# Altium PCB lononTV.PcbDoc
Units mm, origin at the board's own origin, x right, y up, seen from the top; angles counter-clockwise.
Board outline 55 x 82 mm, 2 copper layers (Top Layer, Bottom Layer); 56 components, 53 nets, 263 pads, 431 vias.
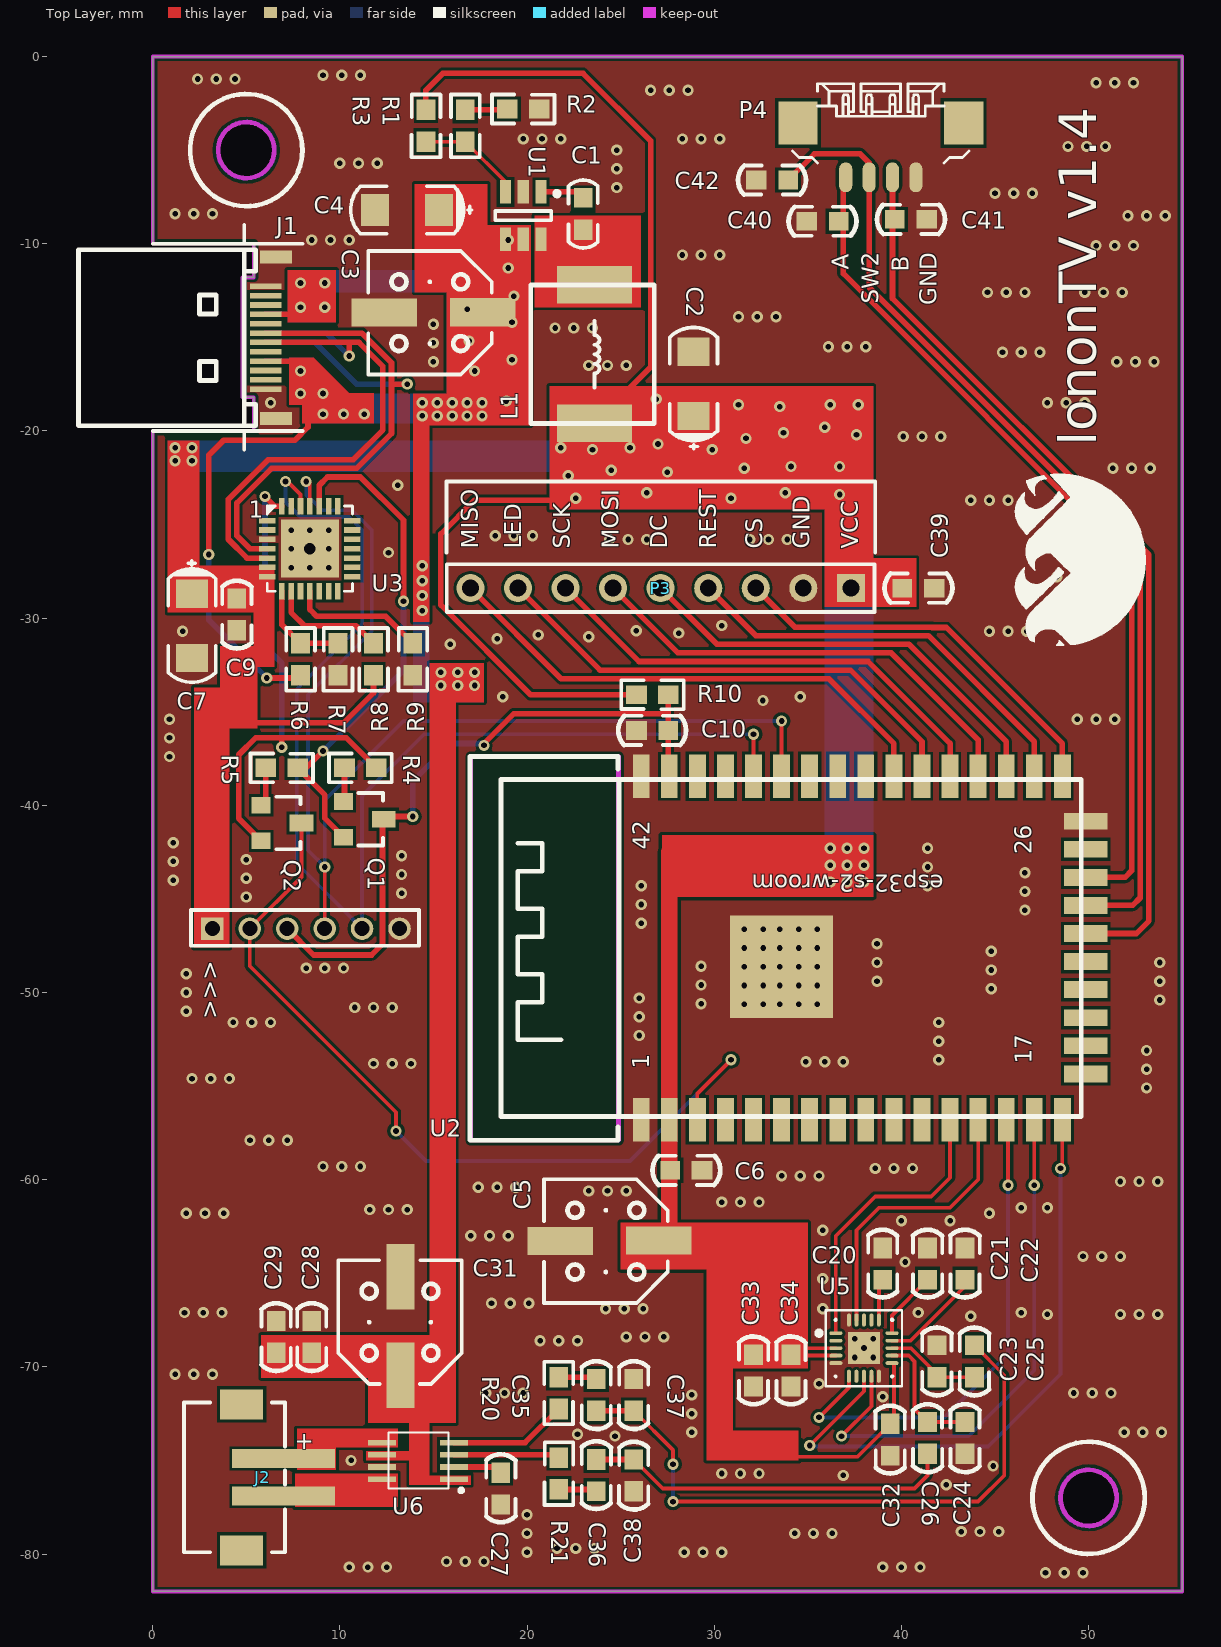
[diagram p0: Top Layer view]
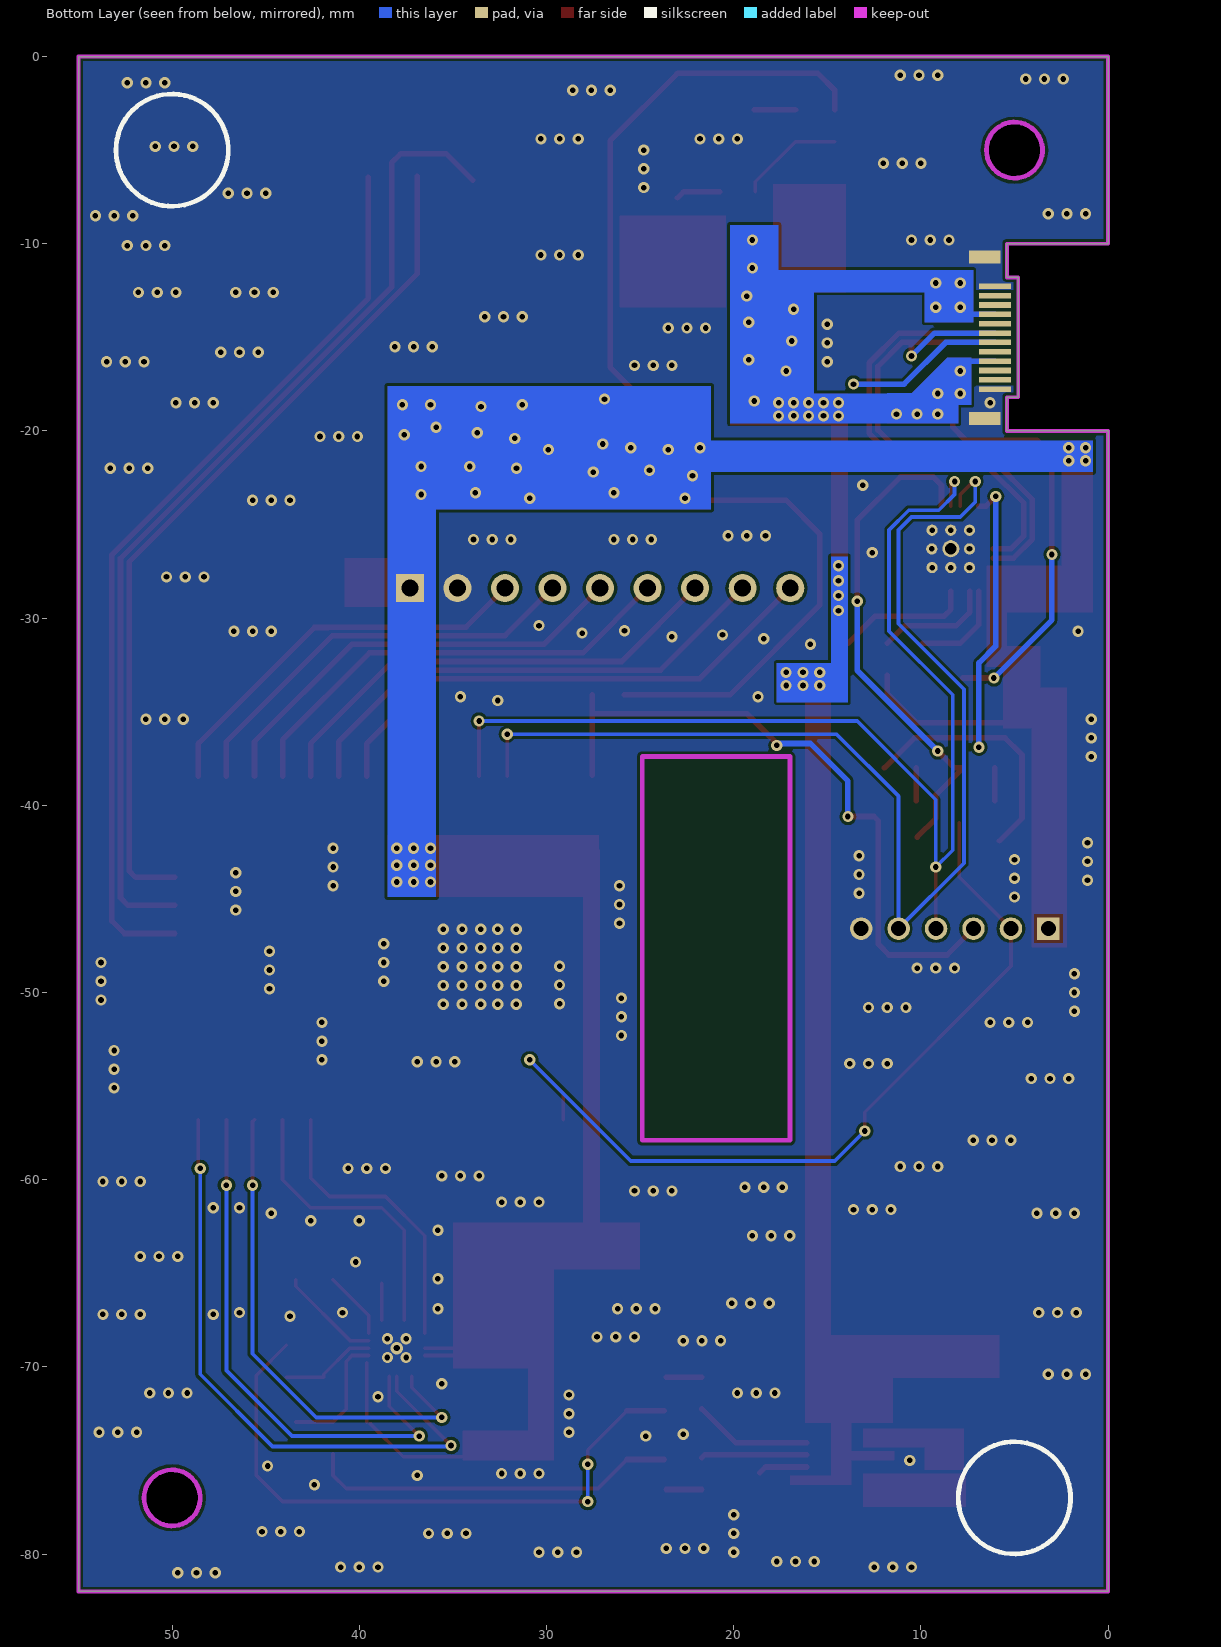
[diagram p1: Bottom Layer view, seen from below]

## Layer stack, top to bottom
Top Layer: signal copper 0.0356
Dielectric: dielectric 0.32, FR-4, Dk 4.8
Bottom Layer: signal copper 0.0356

## Board outline
0,-82 0,-20 5.4,-20 5.4,-18.2 4.8,-18.2 4.8,-11.8 5.4,-11.8 5.4,-10 0,-10 0,0 55,0 55,-82
cut-out: 5,-6.5 cw(c5,-5) 3.5,-5 cw(c5,-5) 5,-3.5 cw(c5,-5) 6.5,-5 cw(c5,-5)
cut-out: 48.5,-77 ccw(c50,-77) 50,-78.5 ccw(c50,-77) 51.5,-77 ccw(c50,-77) 50,-75.5 ccw(c50,-77)

## Design rules (kind name [scope] priority, off if disabled: settings)
Clearance [All] p1: gap=0.16
ComponentClearance [All] p1 off: gap=0.254 collisioncheckmode=3 verticalgap=0.254 showdistances=FALSE
PolygonConnect [All] p1: connectstyle=Direct reliefconductorwidth=0.254 reliefentries=4 polygonreliefangle="90 Angle"
RoutingVias [All] p1: holewidth=0.3 width=0.6 viastyle="Through Hole" minholewidth=0.3 minwidth=0.6 maxholewidth=0.3 maxwidth=0.6
SilkscreenOverComponentPads [All] p1: minsilkscreentomaskgap=0.254
SolderMaskExpansion [All] p1: expansion=0.102
Width [All] p1: maxlimit=3 minlimit=0.2 preferedwidth=0.2
26 further rules are at their usual default settings.

## Components (designator, comment, footprint, x,y, rotation, side; value= is the part's Value field where it differs from the comment)
<<< "" 6PIN_2.0 3.2,-46.6 r0 top
C1 "100nF" 0603C 23,-8.4 r270 top
C2 "10uF" 1206-A 28.9,-19.2 r90 top
C3 "220uF" 铝电容6.6 15,-13.7 r0 top
C4 "10uF" 1206-A 15.3,-8.2 r180 top
C5 "220uF/16v" 铝电容6.6 24.4,-63.3 r0 top
C6 "104" "C0603 - duplicate" 28.5,-59.5 r0 top
C7 "10uF" 1206-A 2.1,-28.7 r270 top
C9 "104" "C0603 - duplicate" 4.5,-29.8 r270 top
C10 "105" "C0603 - duplicate" 26.7,-36 r180 top
C20 "105" "C0603 - duplicate" 39,-64.5 r90 top
C21 "105" "C0603 - duplicate" 41.4,-64.5 r90 top
C22 "105" "C0603 - duplicate" 43.4,-64.5 r90 top
C23 "22p" "C0603 - duplicate" 41.9,-69.7 r270 top
C24 "22p" "C0603 - duplicate" 43.4,-73.8 r270 top
C25 "105" "C0603 - duplicate" 43.9,-69.7 r270 top
C26 "105" "C0603 - duplicate" 41.4,-73.8 r270 top
C27 "105" "C0603 - duplicate" 18.6,-76.5 r90 top
C28 "104" "C0603 - duplicate" 8.5,-68.4 r270 top
C29 "105" "C0603 - duplicate" 6.6,-68.4 r270 top
C31 "220uF" 铝电容6.6 13.2,-67.8 r270 top
C32 "105" "C0603 - duplicate" 39.4,-73.9 r90 top
C33 "104" "C0603 - duplicate" 32.1,-70.2 r90 top
C34 "104" "C0603 - duplicate" 34.099,-70.2 r90 top
C35 "104" "C0603 - duplicate" 23.7,-71.5 r270 top
C36 "104" "C0603 - duplicate" 23.7,-75.8 r90 top
C37 "22p" "C0603 - duplicate" 25.7,-71.5 r270 top
C38 "22p" "C0603 - duplicate" 25.7,-75.8 r270 top
C39 "104" "C0603 - duplicate" 40.9,-28.4 r0 top
C40 "104" "C0603 - duplicate" 35.8,-8.8 r180 top
C41 "104" "C0603 - duplicate" 40.5,-8.7 r0 top
C42 "104" "C0603 - duplicate" 33.1,-6.6 r180 top
J1 "" TYPE-C夹板C2856664 6.6,-10.7 r270 top
J2 "SPK" "PH2.0-2P SMT 立" 6,-75.9 r90 top
L1 "6.8uH" 电感7.4*6.6 26.8,-12.2 r270 top
P3 "Display" HDR1X9 37.3,-28.4 r180 top
P4 "Header 4" "MX1.25-4P 卧" 38.9,-5 r0 top
Q1 "8050" 3904 10.2,-39.8 r270 top
Q2 "8050" 3904 5.8,-40 r270 top
R1 "10k" 0603R 16.7,-3.699 r270 top
R2 "1.3k" 0603R 19.8,-2.8 r180 top
R3 "51k" 0603R 14.6,-3.7 r270 top
R4 "10K" R0603 11.1,-38 r180 top
R5 "10K" R0603 6.9,-38 r180 top
R6 "22.1K" R0603 7.9,-32.2 r270 top
R7 "47.5K" R0603 9.9,-32.2 r270 top
R8 "2K" R0603 11.8,-32.2 r270 top
R9 "10K" R0603 13.9,-32.2 r270 top
R10 "10K" 0603R 26.7,-34.1 r0 top
R20 "150K" 0603R 21.7,-71.4 r90 top
R21 "150K" 0603R 21.7,-75.7 r270 top
U1 "STI3470" SOT-23-6L 19.8,-8.5 r270 top
U2 "esp32-s2-wroom" ESP32-S2-WROOM 26.1,-56.7 r90 top
U3 "CP2102N" "QFN 28-pin-05P" 8.4,-26.3 r270 top
U5 "ES8311" QFN20_3*3 36.5,-68.2 r0 top
U6 "NS4150" MSOP8 16.1,-76 r180 top

## Footprints (in the part's own frame and the unit in brackets; to place one, negate y for a bottom-side part, rotate by r counter-clockwise, add the part's x,y. Pads: shape width x height; smd on the part's side, far side on the other; paste and mask are expansions set on the pad)
6PIN_2.0 [mm]
  rect 1.2x1.2 hole 0.8: 1(-0.011,0.01)
  round 1.2 hole 0.8: 2(1.989,0.01) 3(3.989,0.01) 4(5.989,0.01) 5(7.989,0.01) 6(9.989,0.01)
  silkscreen extent -1.15,-0.91 11.03,1.01
0603C [mm]
  rect 1.05x1 smd: 1(-0.85,0)
  rect 1.1x1 smd: 2(0.85,0)
  silkscreen extent -1.8,-0.78 1.83,0.78
0603R [mm]
  rect 1.1x1 smd: 1(-0.85,0) 2(0.85,0)
  silkscreen extent -1.67,-0.77 1.67,0.77
1206-A [mm]
  rect 1.5x1.7 smd: 1(0,0) 2(3.429,0)
  silkscreen extent -1.76,-1.27 4.72,1.27
3904 [mm]
  rect 0.889x1.016 smd: 1(0,0) 3(1.9,0)
  rect 0.9x1.27 smd: 2(0.95,2.15)
  silkscreen extent -0.45,0.8 2.35,2.1
"C0603 - duplicate" [mm]
  rect 1.05x1 smd: 1(-0.85,0)
  rect 1.1x1 smd: 2(0.85,0)
  silkscreen extent -1.8,-0.78 1.83,0.78
ESP32-S2-WROOM [mm]
  rect 2.3x0.9 smd: 1(-0.1,0) 2(-0.1,-1.5) 3(-0.1,-3) 4(-0.1,-4.5) 5(-0.1,-6) 6(-0.1,-7.5) 7(-0.1,-9) 8(-0.1,-10.5) 9(-0.1,-12) 10(-0.1,-13.5) 11(-0.1,-15) 12(-0.1,-16.5) 13(-0.1,-18) 14(-0.1,-19.5) 15(-0.1,-21) 16(-0.1,-22.5) 27(18.25,-22.5) 28(18.25,-21) 29(18.25,-19.5) 30(18.25,-18) 31(18.25,-16.5) 32(18.25,-15) 33(18.25,-13.5) 34(18.25,-12) 35(18.25,-10.5) 36(18.25,-9) 37(18.25,-7.5) 38(18.25,-6) 39(18.25,-4.5) 40(18.25,-3) 41(18.25,-1.5) 42(18.25,0)
  rect 0.9x2.3 smd: 17(2.35,-23.75) 18(3.85,-23.75) 19(5.35,-23.75) 20(6.85,-23.75) 21(8.35,-23.75) 22(9.85,-23.75) 23(11.35,-23.75) 24(12.85,-23.75) 25(14.35,-23.75) 26(15.85,-23.75)
  rect 5.5x5.5 smd: 43(8.073,-7.5)
  Keep-Out Layer lines w0.254: -1.2,9.11 -1.2,1.21 19.3,1.21 19.3,9.11 -1.2,9.11
  silkscreen extent -1.2,-23.51 19.3,9.14
HDR1X9 [mm] "Connector; Header; 9 Position"
  rect 1.5x1.5 hole 0.9: 1(0,0)
  round 1.5 hole 0.9: 2(2.54,0) 3(5.08,0) 4(7.62,0) 5(10.16,0) 6(12.7,0) 7(15.24,0) 8(17.78,0) 9(20.32,0)
  silkscreen extent -1.27,-1.27 21.59,1.27
MSOP8 [mm]
  rect 1.5x0.3 smd: 1(0,0) 2(0,-0.65) 3(0,-1.3) 4(0,-1.95) 5(3.85,-1.95) 6(3.85,-1.3) 7(3.85,-0.65) 8(3.85,0)
  silkscreen extent -0.46,-2.5 3.5,0.68
"MX1.25-4P 卧" [mm]
  rect 2.1x2.3 smd: 0(-4.425,1.45) 0(4.425,1.45)
  oval 0.7x1.6 smd: 1(1.875,-1.45) 2(0.625,-1.45) 3(-0.625,-1.45) 4(-1.875,-1.45)
  silkscreen extent -4.71,-0.69 4.71,3.55
"PH2.0-2P SMT 立" [mm]
  rect 1.6x2.3 smd: 0(-3.9,1.25) 0(3.9,1.25)
  rect 1x5.5 smd: 1(-1,-1) 2(1,-1)
  silkscreen extent -4,-1.07 4,4.33
QFN20_3*3 [mm]
  oval 0.7x0.2 smd: 1(0,0) 2(0,-0.4) 3(0,-0.8) 4(0,-1.2) 5(0,-1.6) 11(3,-1.6) 12(3,-1.2) 13(3,-0.8) 14(3,-0.4) 15(3,0)
  oval 0.2x0.7 smd: 6(0.7,-2.3) 7(1.1,-2.3) 8(1.5,-2.3) 9(1.9,-2.3) 10(2.3,-2.3) 16(2.3,0.7) 17(1.9,0.7) 18(1.5,0.7) 19(1.1,0.7) 20(0.7,0.7)
  rect 1.7x1.7 smd: 21(1.5,-0.8)
  silkscreen extent -1.02,-2.83 3.53,1.23
"QFN 28-pin-05P" [mm]
  rect 0.3x0.88 smd: 1(-1.506,-2.276) 2(-1.006,-2.276) 3(-0.506,-2.276) 4(-0.006,-2.276) 5(0.494,-2.276) 6(0.994,-2.276) 7(1.494,-2.276) 15(1.494,2.274) 16(0.994,2.274) 17(0.494,2.274) 18(-0.006,2.274) 19(-0.506,2.274) 20(-1.006,2.274) 21(-1.506,2.274)
  rect 0.88x0.3 smd: 8(2.269,-1.501) 9(2.269,-1.001) 10(2.269,-0.501) 11(2.269,-0.001) 12(2.269,0.499) 13(2.269,0.999) 14(2.269,1.499) 22(-2.281,1.499) 23(-2.281,0.999) 24(-2.281,0.499) 25(-2.281,-0.001) 26(-2.281,-0.501) 27(-2.281,-1.001) 28(-2.281,-1.501)
  round 0.6 hole 0.3: 29(-0.996,1.002) 29(-0.996,0.002) 29(-0.996,-0.998) 29(0.004,1.018) 29(0.004,-0.998) 29(1.004,1.002) 29(1.004,0.002) 29(1.004,-0.998)
  round 0.914 hole 0.6: 29(-0.006,-0.001)
  rect 3.1x3.1 smd: 29(-0.006,-0.001)
  silkscreen extent -2.28,-2.28 2.27,2.27
R0603 [mm]
  rect 1.1x1 smd: 1(-0.85,0) 2(0.85,0)
  silkscreen extent -1.67,-0.77 1.67,0.77
SOT-23-6L [mm] "SOT23, 6-Leads, Body 3.0x2.9mm (max), Pitch 0.95mm, IPC Medium Density"
  rect 1.25x0.6 smd: 1(-1.272,0.945) 2(-1.272,-0.005) 3(-1.272,-0.955) 4(1.265,-0.95) 5(1.265,0) 6(1.265,0.95)
  silkscreen extent -1.3,-1.5 0.25,1.93
TYPE-C夹板C2856664 [mm]
  rect 0.7x1.7 smd: 25(0.004,-0.009) 25(8.644,-0.009)
  rect 0.7x1.7 smd far side: 26(0.004,-0.009) 26(8.644,-0.009)
  rect 0.3x1.7 smd: A1(1.574,-0.559) A2(2.074,-0.559) A3(2.574,-0.559) A4(3.074,-0.559) A5(3.574,-0.559) A6(4.074,-0.559) A7(4.574,-0.559) A8(5.074,-0.559) A9(5.574,-0.559) A10(6.074,-0.559) A11(6.574,-0.559) A12(7.074,-0.559)
  rect 0.3x1.7 smd far side: B1(7.074,-0.559) B2(6.574,-0.559) B3(6.074,-0.559) B4(5.574,-0.559) B5(5.074,-0.559) B6(4.574,-0.559) B7(4.074,-0.559) B8(3.574,-0.559) B9(3.074,-0.559) B10(2.574,-0.559) B11(2.074,-0.559) B12(1.574,-0.559)
  silkscreen extent -0.38,-10.56 9.02,-1.09
电感7.4*6.6 [mm]
  rect 2x4 smd: 1(0,-3.2) 2(7.4,-3.2)
  silkscreen extent 0,-6.6 7.4,0
铝电容6.6 [mm]
  rect 3.5x1.5 smd: 1(2.64,0.04) 2(-2.62,0.03)
  silkscreen extent -3.49,-3.29 3.11,3.31

## Part data
<<<: library part "Header 6", "Header, 6-Pin"
C1: library part CAP, "贴片电容"
C2 C3 C4: library part CAPACITOR, "钽电容"
C5 C31: library part CAPACITOR, "Capacitor"
C6 C7 C9 C10 C20 C21 C22 C23 C24 C25 C26 C27 C28 C29 C32 C33 C34 C35 C36 C37 C38 C39 C40 C41 C42: library part CAP, "Capacitor"
J1: library part TYPE-C夹板C2856664
J2: library part CON2
L1: library part Inductor, "Inductor"
P3: library part "Header 9", "Header, 9-Pin"
P4: "Header, 4-Pin"
Q1 Q2: library part NPN, "NPN Transistor"
R1 R2 R3 R4 R5 R6 R7 R8 R9 R10 R20 R21: library part RES1
U1: library part RT7285/A

## Via types
v1: diameter 0.6, hole 0.3, Top Layer to Bottom Layer, tented both sides, 430 vias
v2: diameter 0.66, hole 0.33, Top Layer to Bottom Layer, tented both sides, 1 vias

## Nets (pads, with @x,y where several pads share a name; then routed paths per layer and width w, separated by ;. In a path a pad name is that pad's centre, name@x,y a point inside that pad or via, vN(x,y) a via of type N, cw(c..) or ccw(c..) an arc to the next point about the centre after c; other vN are vias at no path point)
CTS: U3.23
DCD: U3.1
DECODER_A: C40.1 P4.4 U2.24 | length 46.1
  Top Layer w0.3: P4.4@36.9,-6.4 36.9,-11.6 52.3,-27 52.3,-43.5 51.95,-43.85 U2.24
DECODER_B: C41.1 P4.2 U2.22 | length 49.1
  Top Layer w0.3: P4.2 39.525,-12.924 53.22,-26.619 53.22,-46.18 52.55,-46.85 U2.22
DECODER_SW2: C42.1 P4.3 U2.23 | length 53.4
  Top Layer w0.3: C42.1 35.35,-5.2 37.8,-5.2 38.275,-5.675 P4.3 38.275,-12.324 52.76,-26.809 52.76,-44.94 52.35,-45.35 U2.23
DN: J1.A7 J1.B7 U3.5 | length 30.3
  Top Layer w0.3: J1.A7 10.5,-15.274 ; U3.5 5.043,-26.794 4.04,-25.791 4.04,-23.66 6.16,-21.54 10.709,-21.54 12.3,-19.949 12.3,-16.551 11.023,-15.274 10.5,-15.274 ; v1(10.5,-16) 10.5,-15.274
  Bottom Layer w0.3: J1.B7 9.274,-14.774 v1(10.5,-16)
DP: J1.A6 J1.B6 U3.4 | length 33.9
  Top Layer w0.3: J1.A6 11.174,-14.774 12.76,-16.36 12.76,-17.5 ; U3.4 5.194,-26.294 4.5,-25.6 4.5,-23.851 6.351,-22 10.9,-22 12.76,-20.14 12.76,-17.5 ; v1(13.6,-17.5) 12.76,-17.5
  Bottom Layer w0.3: J1.B6 8.674,-15.274 10.9,-17.5 v1(13.6,-17.5)
DSR: U3.27
DTR: Q2.3 R4.1 U3.28 | length 28.9
  Top Layer w0.3: Q2.3 4.6,-40.7 4.6,-37.3 5.5,-36.4 6.9,-36.4 ; v1(6,-23.5) 6.519,-24.019 U3.28 ; v1(6.9,-36.9) 6.9,-36.4 ; R4.1 10.35,-36.4 6.9,-36.4
  Bottom Layer w0.3: v1(6,-23.5) 6,-31.5 6.9,-32.4 v1(6.9,-36.9)
ES_N: C25.1 C35.2 C37.2 | length 33.6
  Top Layer w0.2: C37.2 27.8,-74.45 v1(27.8,-75.2) ; v1(27.8,-77.2) 44.1,-77.2 45.5,-75.8 45.5,-70.45 C25.1
  Top Layer w0.3: C35.2 C37.2
  Bottom Layer w0.2: v1(27.8,-77.2) v1(27.8,-75.2)
ES_P: C26.2 C36.2 C38.1 | length 19.8
  Top Layer w0.2: C38.1 27.25,-76.5 40.7,-76.5 41.4,-75.8 C26.2
  Top Layer w0.3: C36.2 C38.1
ESP32_RESET: <<<.3 C10.1 Q1.2 R10.2 U2.41 | length 35.5
  Top Layer w0.3: <<<.3 8.599,-48 11.7,-48 12.279,-47.421 12.279,-40.821 Q1.2 ; Q1.2@12.5,-40.6 v1(13.9,-40.6) ; v1(17.7,-36.8) 17.7,-36.7 19.3,-35.1 27.55,-35.1 ; U2.41@27.55,-38.4 27.55,-35.1 ; R10.2 27.55,-35.1
  Bottom Layer w0.3: v1(13.9,-40.6) 13.9,-38.7 15.9,-36.7 17.6,-36.7 v1(17.7,-36.8)
GND: <<<.6 C2.2 C3.2 C4.2 C5.2 C6.2 C7.2 C9.2 C10.2 C20.2 C21.2 C22.2 C23.1 C24.2 C27.1 C28.1 C29.1 C31.2 C32.1 C33.1 C34.1 C37.1 C38.2 C39.2 C40.2 C41.2 C42.2 J1.25 J1.26 J1.A1 J1.A12 J1.B1 J1.B12 P3.2 P4.1 R2.1 R7.2 R9.2 U1.2 U2.1 U2.26 U2.42 U2.43 U3.3 U3.29 U5.5 U5.10 U5.20 U5.21 U6.7
  other v1: 47.7,-81 48.7,-81 49.7,-81 10.5,-80.7 11.5,-80.7 12.5,-80.7 39,-80.7 40,-80.7 41,-80.7 15.7,-80.4 16.7,-80.4 17.7,-80.4 20,-79.9 28.4,-79.9 29.4,-79.9 30.4,-79.9 21.6,-79.7 22.6,-79.7 23.6,-79.7 20,-78.9 34.3,-78.9 35.3,-78.9 36.3,-78.9 43.2,-78.8 44.2,-78.8 45.2,-78.8 20,-77.9 42.4,-76.3 36.9,-75.8 30.4,-75.7 31.4,-75.7 32.4,-75.7 44.9,-75.3 10.6,-75 24.7,-73.7 22.7,-73.6 28.8,-73.5 51.9,-73.5 52.9,-73.5 53.9,-73.5 28.8,-72.5 39,-71.6 28.8,-71.5 17.8,-71.4 18.8,-71.4 19.8,-71.4 49.2,-71.4 50.2,-71.4 51.2,-71.4 35.6,-70.9 1.2,-70.4 2.2,-70.4 3.2,-70.4 37.5,-69.5 38.5,-69.5 20.7,-68.6 21.7,-68.6 22.7,-68.6 37.5,-68.5 38.5,-68.5 25.3,-68.4 26.3,-68.4 27.3,-68.4 43.7,-67.3 47.8,-67.2 51.7,-67.2 52.7,-67.2 53.7,-67.2 1.7,-67.1 2.7,-67.1 3.7,-67.1 40.9,-67.1 46.4,-67.1 24.2,-66.9 25.2,-66.9 26.2,-66.9 35.8,-66.9 18.1,-66.6 19.1,-66.6 20.1,-66.6 35.8,-65.3 40.2,-64.4 49.7,-64.1 50.7,-64.1 51.7,-64.1 17,-63 18,-63 19,-63 35.8,-62.7 40,-62.2 42.6,-62.2 1.8,-61.8 2.8,-61.8 3.8,-61.8 44.7,-61.8 11.6,-61.6 12.6,-61.6 13.6,-61.6 46.4,-61.5 47.8,-61.5 30.4,-61.2 31.4,-61.2 32.4,-61.2 23.3,-60.6 24.3,-60.6 25.3,-60.6 17.4,-60.4 18.4,-60.4 19.4,-60.4 51.7,-60.1 52.7,-60.1 53.7,-60.1 33.6,-59.8 34.6,-59.8 35.6,-59.8 38.6,-59.4 39.6,-59.4 40.6,-59.4 9.1,-59.3 10.1,-59.3 11.1,-59.3 5.2,-57.9 6.2,-57.9 7.2,-57.9 53.1,-55.1 2.1,-54.6 3.1,-54.6 4.1,-54.6 53.1,-54.1 11.8,-53.8 12.8,-53.8 13.8,-53.8 34.9,-53.7 35.9,-53.7 36.9,-53.7 42,-53.6 53.1,-53.1 42,-52.6 26,-52.3 4.3,-51.6 5.3,-51.6 6.3,-51.6 42,-51.6 26,-51.3 1.8,-51 10.8,-50.8 11.8,-50.8 12.8,-50.8 31.61,-50.627 32.61,-50.627 33.51,-50.627 34.51,-50.627 35.51,-50.627 29.3,-50.6 53.8,-50.4 26,-50.3 1.8,-50 44.8,-49.8 31.61,-49.627 32.61,-49.627 33.51,-49.627 34.51,-49.627 35.51,-49.627 29.3,-49.6 38.7,-49.4 53.8,-49.4 1.8,-49 44.8,-48.8 8.2,-48.7 9.2,-48.7 10.2,-48.7 31.61,-48.627 32.61,-48.627 33.51,-48.627 34.51,-48.627 35.51,-48.627 29.3,-48.6 38.7,-48.4 53.8,-48.4 44.8,-47.8 31.61,-47.627 32.61,-47.627 33.51,-47.627 34.51,-47.627 35.51,-47.627 38.7,-47.4 31.61,-46.627 32.61,-46.627 33.51,-46.627 34.51,-46.627 35.51,-46.627 26.1,-46.3 46.6,-45.6 26.1,-45.3 5,-44.9 13.3,-44.7 46.6,-44.6 26.1,-44.3 41.4,-44.3 1.1,-44 5,-43.9 13.3,-43.7 46.6,-43.6 41.4,-43.3 1.1,-43 5,-42.9 13.3,-42.7 41.4,-42.3 1.1,-42 0.9,-37.4 0.9,-36.4 0.9,-35.4 49.4,-35.4 50.4,-35.4 51.4,-35.4 32.6,-34.4 18.7,-34.2 34.6,-34.2 15.9,-31.4 18.4,-31.1 23.3,-31 20.6,-30.9 28.1,-30.8 1.6,-30.7 44.7,-30.7 45.7,-30.7 46.7,-30.7 25.835,-30.675 30.4,-30.4 48.3,-27.8 49.3,-27.8 50.3,-27.8 12.6,-26.5 24.4,-25.8 25.4,-25.8 26.4,-25.8 31.9,-25.8 32.9,-25.8 33.9,-25.8 18.3,-25.6 19.3,-25.6 20.3,-25.6 43.7,-23.7 44.7,-23.7 45.7,-23.7 13.1,-22.9 51.3,-22 52.3,-22 53.3,-22 40.1,-20.3 41.1,-20.3 42.1,-20.3 6.3,-18.5 47.8,-18.5 48.8,-18.5 49.8,-18.5 23.3,-16.5 24.3,-16.5 25.3,-16.5 15,-16.3 51.5,-16.3 52.5,-16.3 53.5,-16.3 45.4,-15.8 46.4,-15.8 47.4,-15.8 36.1,-15.5 37.1,-15.5 38.1,-15.5 15,-15.3 21.5,-14.5 22.5,-14.5 23.5,-14.5 15,-14.3 31.3,-13.9 32.3,-13.9 33.3,-13.9 44.6,-12.6 45.6,-12.6 46.6,-12.6 49.8,-12.6 50.8,-12.6 51.8,-12.6 28.3,-10.6 29.3,-10.6 30.3,-10.6 50.4,-10.1 51.4,-10.1 52.4,-10.1 8.5,-9.8 9.5,-9.8 10.5,-9.8 52.1,-8.5 53.1,-8.5 54.1,-8.5 1.2,-8.4 2.2,-8.4 3.2,-8.4 45,-7.3 46,-7.3 47,-7.3 24.8,-7 24.8,-6 10,-5.7 11,-5.7 12,-5.7 24.8,-5 48.9,-4.8 49.9,-4.8 50.9,-4.8 19.8,-4.4 20.8,-4.4 21.8,-4.4 28.3,-4.4 29.3,-4.4 30.3,-4.4 26.6,-1.8 27.6,-1.8 28.6,-1.8 50.4,-1.4 51.4,-1.4 52.4,-1.4 2.4,-1.2 3.4,-1.2 4.4,-1.2 9.1,-1 10.1,-1 11.1,-1
  other v2: 38,-69
GPIO0: <<<.2 Q2.2 U2.3 | length 45.6
  Top Layer w0.2: Q2.2 7.95,-43.829 <<<.2 5.189,-48.589 13,-56.4 v1(13,-57.4) ; U2.3 29.1,-55.4 v1(30.9,-53.6)
  Bottom Layer w0.2: v1(13,-57.4) 14.6,-59 22.7,-59 25.5,-59 v1(30.9,-53.6)
I2C_SCL: U2.12 U5.1 | length 15.7
  Top Layer w0.2: U5.1 36.5,-63 38.6,-60.9 41.6,-60.9 42.6,-59.9 U2.12
I2C_SDA: U2.13 U5.19 | length 15.6
  Top Layer w0.2: U5.19 37.6,-62.7 38.8,-61.5 42.6,-61.5 44.1,-60 U2.13
I2S_BCLK: U2.14 U5.6 | length 26.9
  Top Layer w0.2: v1(35.6,-72.7) 37.2,-71.1 U5.6 ; U2.14 45.7,-56.9 v1(45.7,-60.3)
  Bottom Layer w0.2: v1(35.6,-72.7) 42.3,-72.7 45.7,-69.3 v1(45.7,-60.3)
I2S_LRCK: U2.16 U5.8 | length 33.6
  Top Layer w0.2: v1(35.1,-74.2) 38,-71.3 U5.8 ; v1(48.5,-59.4) 48.6,-59.3 U2.16
  Bottom Layer w0.2: v1(35.1,-74.2) 35.16,-74.26 44.64,-74.26 48.5,-70.4 v1(48.5,-59.4)
I2S_SDO: U2.15 U5.9 | length 29
  Top Layer w0.2: v1(36.8,-73.7) 38.4,-72.1 U5.9 ; v1(47.1,-60.3) U2.15
  Bottom Layer w0.2: v1(36.8,-73.7) 43.6,-73.7 47.1,-70.2 v1(47.1,-60.3)
NetC1_1: C1.1 U1.1 | length 2.4
  Top Layer w0.3: U1.1 22.678,-7.228 C1.1
NetC1_2: C1.2 L1.1 U1.6
NetC20_1: C20.1 U5.16 | length 2
  Top Layer w0.2: U5.16 C20.1@38.8,-65.55
NetC21_1: C21.1 U5.15 | length 3.6
  Top Layer w0.2: U5.15 39.5,-67.25 C21.1
NetC22_1: C22.1 U5.14 | length 5.5
  Top Layer w0.2: U5.14 40.5,-68.6 43.4,-65.7 C22.1
NetC23_2: C23.2 C25.2 U5.13 | length 5.1
  Top Layer w0.2: U5.13 40.5,-69 41.9,-70.4 C23.2 C25.2
NetC24_1: C24.1 C26.1 U5.12 | length 6.9
  Top Layer w0.2: U5.12 40.391,-69.4 40.7,-69.709 40.7,-72.25 C26.1 C24.1
NetC27_2: C27.2 U6.2 | length 2.6
  Top Layer w0.3: U6.2 18.3,-75.35 C27.2
NetC35_1: C35.1 R20.2 | length 1.9
  Top Layer w0.3: R20.2 C35.1@23.6,-70.55
NetC36_1: C36.1 R21.2 | length 1.9
  Top Layer w0.3: R21.2 C36.1@23.6,-76.55
NetQ1_1: Q1.1 R4.2 | length 1.7
  Top Layer w0.3: Q1.1@10.25,-39.75 R4.2
NetQ2_1: Q2.1 R5.2 | length 1.7
  Top Layer w0.3: Q2.1@6.05,-39.75 R5.2
NetR1_1: R1.1 R2.2 | length 2.2
  Top Layer w0.3: R1.1 R2.2@18.901,-2.849
NetR1_2: R1.2 R3.2 U1.3 | length 5.7
  Top Layer w0.2: R3.2 16.7,-4.55 18.845,-6.694 U1.3
NetR6_1: R6.1 R7.1 U3.8 | length 5.2
  Top Layer w0.3: U3.8 6.899,-30.349 R6.1 R7.1
NetR8_1: R8.1 U3.9 | length 6.2
  Top Layer w0.3: U3.9 7.399,-29.699 8.1,-30.4 10.85,-30.4 R8.1
NetR9_1: R9.1 U3.11 | length 7.2
  Top Layer w0.3: U3.11 8.399,-29.539 8.76,-29.9 12.45,-29.9 R9.1
PA_INL+: R21.1 U6.3 | length 5.7
  Top Layer w0.3: U6.3 21.55,-74.7 R21.1
PA_INL-: R20.1 U6.4 | length 6.3
  Top Layer w0.3: U6.4 19.9,-74.05 R20.1
PA_OUTL+: J2.1 U6.8
PA_OUTL-: J2.2 U6.5
RI: U3.2
RTS: Q1.3 R5.1 U3.24 | length 27.3
  Top Layer w0.3: U3.24 8.899,-22.901 9.34,-22.46 11.091,-22.46 13.4,-24.769 v1(13.4,-29.1) ; v1(9.1,-37.1) 8.2,-38 R5.1 9.2,-39.45 9.2,-40.7 Q1.3
  Bottom Layer w0.3: v1(9.1,-37.1) 13.4,-32.8 v1(13.4,-29.1)
SCREEN_CS: P3.3 U2.27 | length 21.6
  Top Layer w0.3: P3.3 34.3,-30.48 41.631,-30.48 41.651,-30.5 42.4,-30.5 48.6,-36.7 U2.27
SCREEN_DC: P3.5 U2.29 | length 23.7
  Top Layer w0.3: P3.5 30.14,-31.4 40.4,-31.4 45.6,-36.6 U2.29
SCREEN_LED: P3.8 U2.32 | length 26.8
  Top Layer w0.3: P3.8 23.9,-32.78 37.28,-32.78 41.1,-36.6 U2.32
SCREEN_MISO: P3.9 U2.33 | length 27.8
  Top Layer w0.3: P3.9 21.82,-33.24 36.14,-33.24 39.6,-36.7 U2.33
SCREEN_MOSI: P3.6 U2.30 | length 24.8
  Top Layer w0.3: P3.6 28.06,-31.86 39.46,-31.86 44.1,-36.5 U2.30
SCREEN_RESET: P3.4 U2.28 | length 22.7
  Top Layer w0.3: P3.4 32.22,-30.94 41.44,-30.94 47.1,-36.6 U2.28
SCREEN_SCK: P3.7 U2.31 | length 25.7
  Top Layer w0.3: P3.7 25.98,-32.32 38.22,-32.32 42.6,-36.7 U2.31
U0RXD: <<<.5 U2.38 U3.26 | length 63.3
  Top Layer w0.2: v1(7.1,-22.7) 7.2,-22.7 7.899,-23.399 U3.26 ; U2.38 v1(32.1,-36.2)
  Bottom Layer w0.2: v1(7.1,-22.7) 7.1,-23.8 7.9,-24.6 10.5,-24.6 11.2,-25.3 11.2,-30.3 7.7,-33.8 7.7,-43.101 <<<.5 11.189,-39.511 14.5,-36.2 v1(32.1,-36.2)
U0TXD: <<<.4 U2.37 U3.25 | length 62.2
  Top Layer w0.2: v1(8.2,-22.7) 8.3,-22.7 8.399,-22.799 U3.25 ; <<<.4 9.2,-46.579 v1(9.2,-43.3) ; U2.37 v1(33.6,-35.5)
  Bottom Layer w0.2: v1(8.2,-22.7) 8.2,-23.4 9.04,-24.24 10.649,-24.24 11.7,-25.291 11.7,-30.7 8.3,-34.1 8.3,-38.4 8.3,-42.4 v1(9.2,-43.3) 9.2,-39.7 13.4,-35.5 v1(33.6,-35.5)
VCC: C3.1 C4.1 C28.2 C29.2 C31.1 J1.A4 J1.A9 J1.B4 J1.B9 R6.2 U1.4 U1.5 U6.1 U6.6 | length 29.4
  Top Layer w0.3: v1(3,-26.6) 2.9,-26.5 3,-26.4 3,-21.3 3.8,-20.5 7.6,-20.5 8.3,-19.8 8.3,-18.9 ; J1.A9 7.874,-16.274 ; J1.A4 7.826,-13.774 ; v1(6.1,-33.2) R6.2@7.75,-33.2
  Bottom Layer w0.3: v1(3,-26.6) 3,-30.1 v1(6.1,-33.2) ; J1.B4 7.974,-16.274 ; J1.B9 8.126,-13.774
  other v1: 15.4,-33.6 16.3,-33.6 17.2,-33.6 15.4,-32.9 16.3,-32.9 17.2,-32.9 14.4,-29.6 14.4,-28.8 14.4,-28 14.4,-27.2 14.4,-19.2 15.2,-19.2 16,-19.2 16.8,-19.2 17.6,-19.2 9.1,-19.1 10.2,-19.1 11.3,-19.1 14.4,-18.5 15.2,-18.5 16,-18.5 16.8,-18.5 17.6,-18.5 18.9,-18.4 7.9,-18 9.1,-18 7.9,-16.8 17.2,-16.8 19.2,-16.2 16.9,-15.2 19.2,-14.2 16.8,-13.5 7.9,-13.4 9.2,-13.4 19.3,-12.8 7.9,-12.1 9.2,-12.1 19,-11.3 19,-9.8
VCC33: <<<.1 C2.1 C5.1 C6.1 C7.1 C9.1 C32.2 C33.2 C34.2 C39.1 L1.2 P3.1 R3.1 R8.2 R10.1 U2.2 U3.6 U3.7 U5.3 U5.4 U5.11 | length 100.4
  Top Layer w0.2: 32.8,-74.8 37.65,-74.8 C32.2 ; C34.2@34.149,-69.4 U5.4 ; C34.2@34.4,-69 U5.3 ; C32.2@39.6,-72.95 U5.11@39.6,-69.8
  Top Layer w0.3: 5.1,-35.6 10.2,-35.6 11.8,-34 R8.2 ; 6.1,-31.4 6.1,-29.5 ; R3.1 14.6,-1.8 15.5,-0.9 23,-0.9 26.6,-4.5 26.6,-16.6 L1.2 ; 21.5,-23.7 17.2,-23.7 15.4,-25.5 15.4,-29.3 20.2,-34.1 R10.1
  Top Layer w0.9: C5.1@27.6,-63.4 27.6,-42.5
  other v1: 36.2,-44.1 37.1,-44.1 38,-44.1 36.2,-43.2 37.1,-43.2 38,-43.2 36.2,-42.3 37.1,-42.3 38,-42.3 22.6,-23.6 30.9,-23.6 36.7,-23.4 26.4,-23.3 33.8,-23.3 22.2,-22.4 27.5,-22.2 24.5,-22.1 31.6,-22 34.1,-21.9 36.7,-21.9 1.2,-21.6 2.1,-21.6 23.5,-21 29.9,-21 1.2,-20.9 2.1,-20.9 21.8,-20.9 25.5,-20.9 27,-20.7 31.7,-20.4 37.6,-20.2 33.7,-20.1 35.9,-19.8 33.5,-18.7 31.3,-18.6 36.2,-18.6 37.7,-18.6 26.9,-18.3
pads on no net: J1.A2 J1.A3 J1.A5 J1.A8 J1.A10 J1.A11 J1.B2 J1.B3 J1.B5 J1.B8 J1.B10 J1.B11 J2.0 P4.0 U2.4 U2.5 U2.6 U2.7 U2.8 U2.9 U2.10 U2.11 U2.17 U2.18 U2.19 U2.20 U2.21 U2.25 U2.34 U2.35 U2.36 U2.39 U2.40 U3.10 U3.12 U3.13 U3.14 U3.15 U3.16 U3.17 U3.18 U3.19 U3.20 U3.21 U3.22 U5.2 U5.7 U5.17 U5.18

## Polygon pours and split planes (outlines as drawn)
GND on Bottom Layer "Keep-Out Layer-No Net" (solid, remove dead copper, pour order 1000): -25.1,10.6 93.3,10.6 96.4,7.5 74.5,-14.4 74.5,-94.7 -15.3,-94.7 -16.9,-96.3
GND on Top Layer "Keep-Out Layer-No Net" (solid, remove dead copper, pour order 1001): -15.4,9.4 -12.7,6.7 89,6.7 89,-83.4 76.6,-95.8 76,-96.4 -7.4,-96.4

## Keep-outs
Keep-Out Layer:
  circle w0.254: c5,-5 r1.5
  circle w0.254: c50,-77 r1.5
  lines w0.2: 0,-82 55,-82 55,0 0,0 0,-10 5.4,-10 5.4,-11.8 4.8,-11.8 4.8,-18.2 5.4,-18.2 5.4,-20 0,-20 0,-82

## Other copper
Top Layer:
  rectangle net VCC: 13.7,-76.3 17,-75.8
  rectangle net VCC: 11.4,-75 14.2,-74.5
  rectangle net VCC: 13.7,-76.3 14.8,-72.8
  rectangle net PA_OUTL+: 7.6,-77.5 13.1,-75.7
  rectangle net PA_OUTL-: 7.7,-75.5 9.8,-73.3
  rectangle net PA_OUTL-: 7.7,-74.3 13.1,-73.3
  rectangle net VCC33: 0.8,-29.7 2.5,-20.5
  rectangle net VCC33: 0.8,-29.7 6.5,-27.2
  rectangle net VCC: 14,-12.6 17.9,-6.8
  rectangle net NetC1_2: 20.4,-13.4 26.1,-8.5
  rectangle net VCC33: 21.2,-24.2 38.5,-17.6
  rectangle net VCC: 7.2,-14.2 9.8,-11.4
  rectangle net VCC: 17.6,-12.6 20.2,-9
  rectangle net VCC33: 35.9,-29.4 38.5,-22
  rectangle net VCC33: 35.9,-29.4 40.8,-26.8
  rectangle net VCC33: 27.2,-44.9 38.5,-41.6
  rectangle net VCC33: 25,-64.8 35,-62.3
  rectangle net VCC33: 29.6,-70.1 35,-62.3
  rectangle net VCC: 13.9,-19.7 20.2,-18
  rectangle net VCC: 13.9,-30.2 14.8,-18.8
  rectangle net VCC: 14.8,-34.5 17.7,-32.4
  rectangle net VCC: 14.8,-72.5 16.2,-34.2
  rectangle net VCC: 15.7,-19 20.2,-12.5
  rectangle net VCC: 11.5,-73 16.2,-68.3
  rectangle net VCC: 5.8,-70.6 13,-68.3
  rectangle net VCC33: 29.6,-70.1 32.4,-69.4
  rectangle net VCC33: 29.6,-75 31,-69.4
  rectangle net VCC33: 29.6,-75 34.5,-73.4
  rectangle net VCC33: 2.2,-47.6 4.1,-33.7
  rectangle net VCC33: 5.401,-32.6 6.5,-29
  rectangle net VCC33: 3.6,-32.6 6.5,-31.5
  rectangle net VCC33: 3.6,-35.9 5.6,-31.5
  region net VCC: 7.3,-16.1 7.3,-18.6 8,-18.6 8,-19.6 11.8,-19.6 11.8,-18 10.5,-18 8.6,-16.1
Bottom Layer:
  rectangle net VCC33: 0.8,-22.2 21.8,-20.5
  rectangle net VCC33: 21.2,-24.2 38.5,-17.6
  rectangle net VCC: 15.7,-19.6 20.2,-11.4
  rectangle net VCC: 11.6,-19.6 20.2,-18
  rectangle net VCC: 7.2,-14.2 9.8,-11.4
  rectangle net VCC: 9.4,-12.6 20.2,-11.4
  rectangle net VCC: 17.6,-12.6 20.2,-9
  rectangle net VCC33: 35.9,-44.9 38.5,-22.3
  rectangle net VCC: 13.9,-34.5 14.8,-26.7
  rectangle net VCC: 13.9,-34.5 17.7,-32.4
  region net VCC: 7.3,-16.1 7.3,-18.6 8,-18.6 8,-19.6 11.8,-19.6 11.8,-18 10.5,-18 8.6,-16.1

## Silkscreen, mask and mechanical layers (free items; w line width, h text height)
Top Overlay:
  drawing of 669 lines, arcs and shapes, not listed
  text "A" at 37.2,-11.4 h0.9 r90
  text "B" at 40.4,-11.5 h0.9 r90
  text "SW2" at 38.8,-13.2 h0.9 r90
  text "GND" at 41.9,-13.3 h0.9 r90
  text "lononTV v1.4" at 50.4,-20.8 h2 r90
  text "MISO" at 17.4,-26.3 h0.9 r90
  text "LED" at 19.7,-26.3 h0.9 r90
  text "SCK" at 22.3,-26.3 h0.9 r90
  text "MOSI" at 24.9,-26.3 h0.9 r90
  text "DC" at 27.5,-26.3 h0.9 r90
  text "REST" at 30.1,-26.3 h0.9 r90
  text "CS" at 32.6,-26.3 h0.9 r90
  text "GND" at 35.1,-26.3 h0.9 r90
  text "VCC" at 37.7,-26.3 h0.9 r90
  text "+" at 7.6,-74.4 h0.9
Bottom Overlay:
  circle w0.254: c50,-5 r3
  circle w0.254: c5,-77 r3

## Text inside footprints (layer, text, board x,y; h text height)
U2: Top Overlay "42" at 26.55,-42.377 h0.9 r90; Top Overlay "26" at 46.96,-42.627 h0.9 r90; Top Overlay "17" at 46.96,-53.817 h0.9 r90; Top Overlay "1" at 26.52,-54.087 h0.9 r90
U3: Top Overlay "1" at 5.138,-24.638 h0.9